# Altium PCB PCB1.PcbDoc
Units mm, origin at the board's own origin, x right, y up, seen from the top; angles counter-clockwise.
Board outline 152.4 x 101.6 mm, 2 copper layers (Top Layer, Bottom Layer); 14 components, 8 nets, 36 pads, 0 vias.
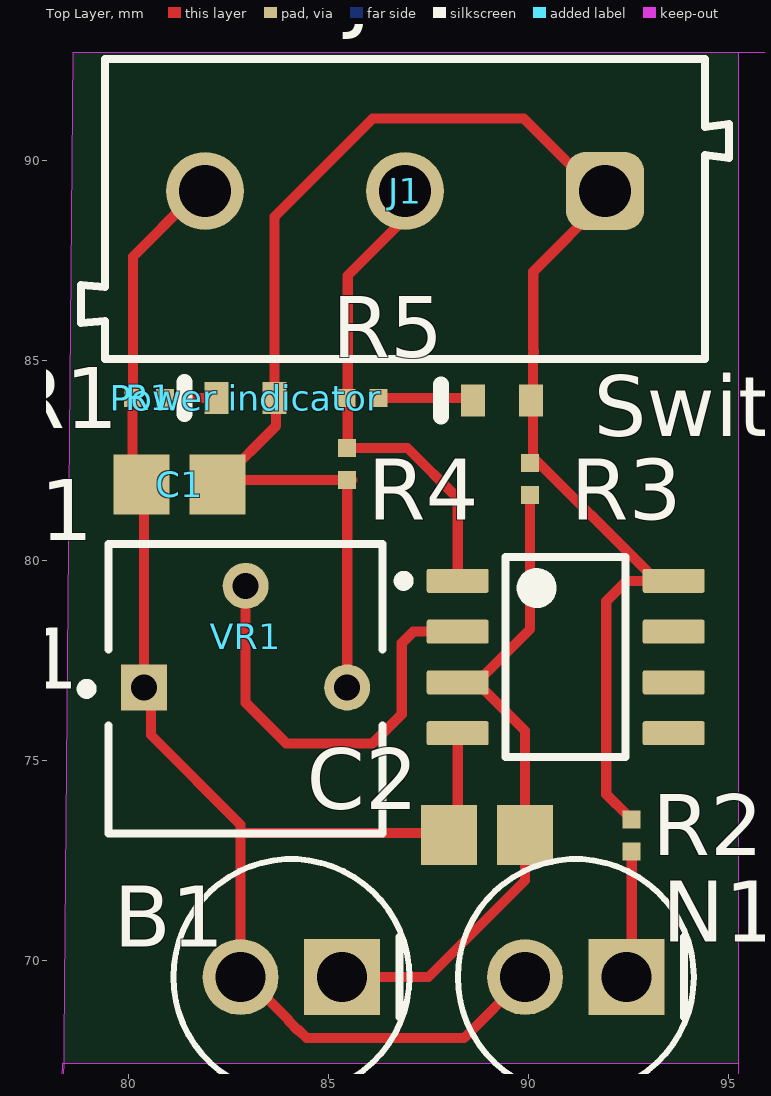
[diagram p0: Top Layer view]
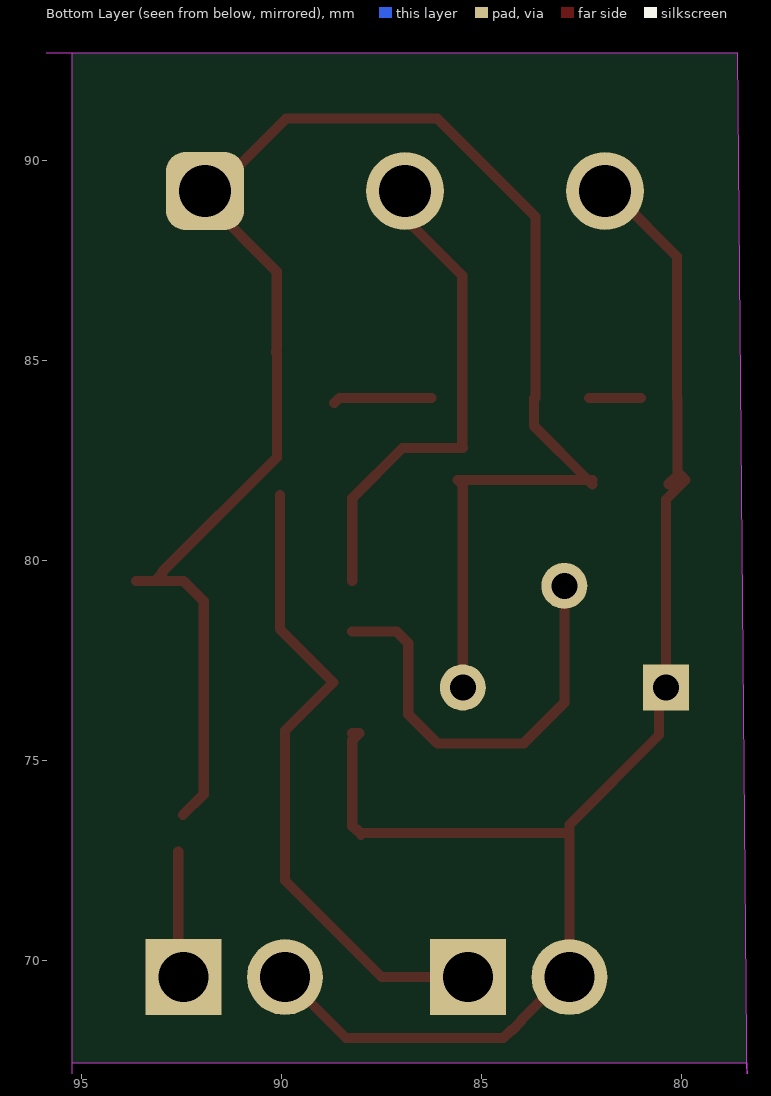
[diagram p1: Bottom Layer view, seen from below]
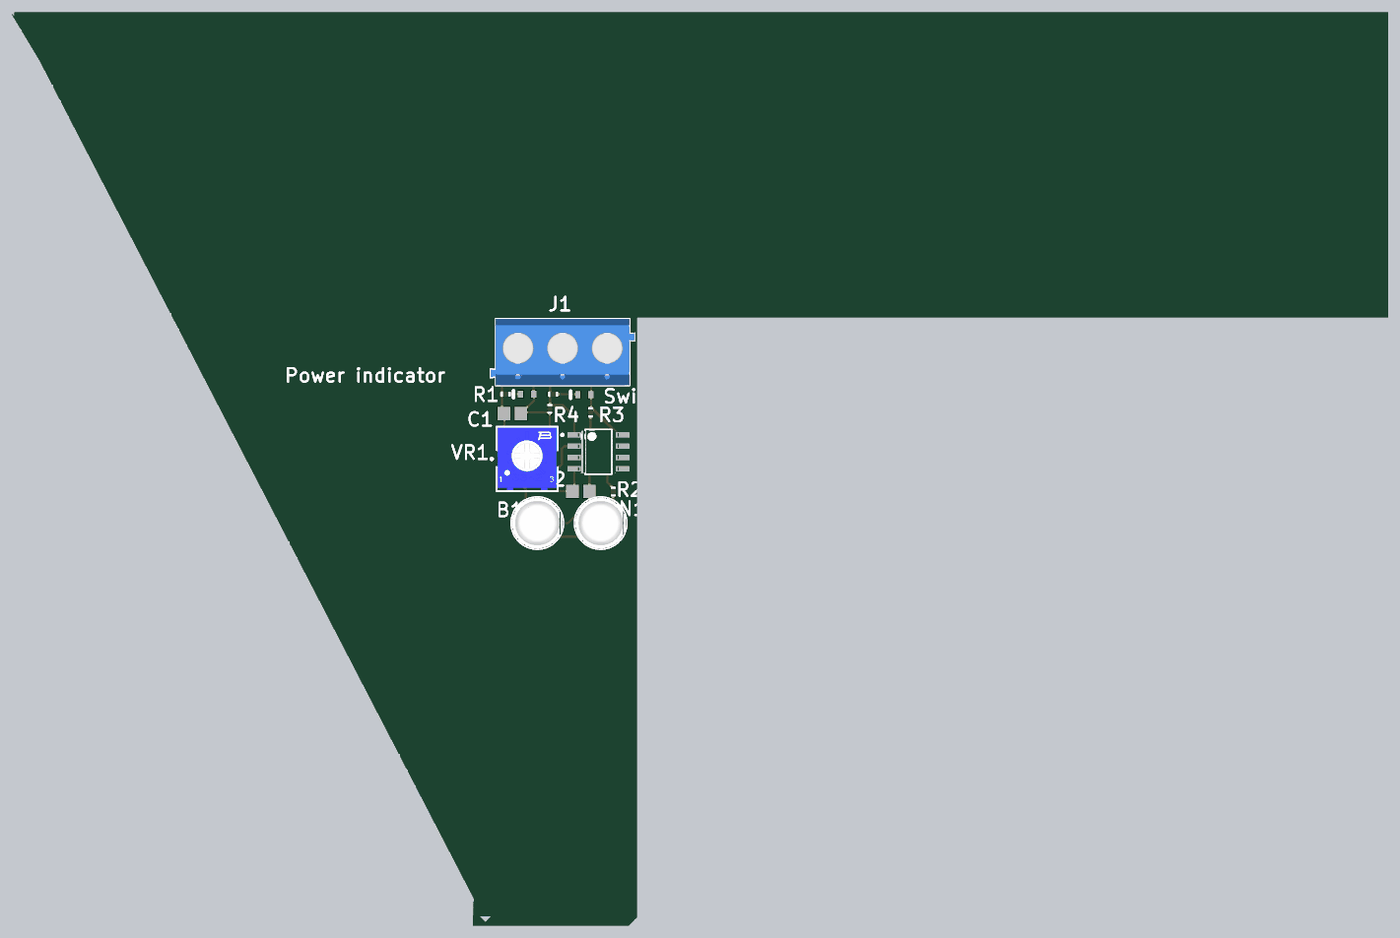
[diagram p2: 3D render of the assembled board from above, using the file's embedded part models]

## Layer stack, top to bottom
Top Solder: solder mask 0.0102, Solder Resist, Dk 3.5
Top Layer: signal copper 0.0356
Dielectric 1: dielectric 0.32, FR-4, Dk 4.8
Bottom Layer: signal copper 0.0356
Bottom Solder: solder mask 0.0102, Solder Resist, Dk 3.5

## Board outline
25.4,25.4 177.8,25.4 177.8,127 25.4,127
cut-out: 25.019,126.873 25.4,126.492 25.4,25.4 77.597,25.4 78.232,24.765 80.137,26.67 80.137,35.052
cut-out: 95.25,92.71 95.25,25.4 179.133,24.066 177.8,92.71
cut-out: 78.359,67.437 95.25,67.437 95.25,25.273 94.361,24.384 76.835,24.384
cut-out: 25.4,127 179.594,127 179.594,92.71 78.613,92.71 77.994,25.4

## Design rules (kind name [scope] priority, off if disabled: settings)
Clearance [All] p1: gap=0.254 ignorepadtopadclearanceinfootprint=FALSE
PolygonConnect [All] p1: connectstyle=Relief reliefconductorwidth=0.254 reliefentries=4 polygonreliefangle="90 Angle" airgapwidth=0.254
RoutingLayers [All] p1: top layer_v5=TRUE bottom layer_v5=FALSE
RoutingVias [All] p1: holewidth=0.711 width=1.27 viastyle="Through Hole" minholewidth=0.711 minwidth=1.27 maxholewidth=0.711 maxwidth=1.27
SolderMaskExpansion [All] p1: expansion=0.102 istentingtop=FALSE
SupplyNets "Schematic Supply Nets_1" [InNet('VCC')] p1: voltage=0.000
SupplyNets "Schematic Supply Nets" [InNet('GND')] p2: voltage=0.000
Width Width_1 [All] p1: maxlimit=0.254 minlimit=0.254 preferedwidth=0.254
Width [All] p2: maxlimit=0.254 minlimit=0.004 preferedwidth=0.254 toplayer_prefwidth=0.006 bottomlayer_minwidth=0.254 minimp=50.000000 maximp=50.000000 favimp=50.000000
29 further rules are at their usual default settings.

## Classes and differential pairs
component class Sheet1: B1 C1 C2 N1 "Power indicator" R1 R2 R3 R4 R5 "Switch indicator" VR1

## Components (designator, comment, footprint, x,y, rotation, side; value= is the part's Value field where it differs from the comment)
B1 "TEPT5600" FP-6_544-5185_03-4-MFG 84.074,69.596 r180 top
C1 "GRM21BR71H104KA01L" CAPC2013X135X45ML10T25 81.28,81.915 r0 top
C2 "GRM21BR71H104KA01L" CAPC2013X135X45ML10T25 88.966,73.152 r0 top
J1 "691102710003" 691102710003 86.915,88.798 r180 top
N1 "TEPT5600" FP-6_544-5185_03-4-MFG 91.186,69.596 r180 top
"Power indicator" "TLMS1000-GS08" VISH-TLMS1000_V 82.931,84.074 r180 top
R1 "ERJ2GE0R00X" RESC1005X40X25LL05T05 80.518,84.074 r0 top
R2 "ERJ2GE0R00X" RESC1005X40X25LL05T05 92.583,73.133 r90 top
R3 "ERJ2GE0R00X" RESC1005X40X25LL05T05 90.043,82.042 r90 top
R4 "ERJ2GE0R00X" RESC1005X40X25LL05T05 85.471,82.423 r270 top
R5 "ERJ2GE0R00X" RESC1005X40X25LL05T05 85.852,84.074 r0 top
"Switch indicator" "TLMS1000-GS08" VISH-TLMS1000_V 89.344,84.01 r180 top
U? "LM393ADR" FP-D0008A-MFG 90.932,77.597 r0 top
VR1 "3362P-1-252LF" FP-3362P-MFG 82.931,76.8 r0 top

## Footprints (in the part's own frame and the unit in brackets; to place one, negate y for a bottom-side part, rotate by r counter-clockwise, add the part's x,y. Pads: shape width x height; smd on the part's side, far side on the other; paste and mask are expansions set on the pad)
691102710003 [mm] "5,00mm - modular - blue - Horizontal entry with pressure clamp - 9,9 mm height - 03p"
  rrect50% 1.95x1.95 hole 1.3: 1(-5,-0.45)
  round 1.95 hole 1.3: 2(0,-0.45) 3(5,-0.45)
  silkscreen extent -8.1,-3.75 8.1,3.75, body extent -8.1,-3.75 8.1,3.75, height 9.96
CAPC2013X135X45ML10T25 [mm] "Chip Capacitor, 2-Leads, Body 2.10x1.35mm, IPC Low Density"
  rect 1.4x1.5 smd: 1(-0.95,0) 2(0.95,0)
  body extent -1.05,-0.67 1.05,0.67, height 1.35
FP-6_544-5185_03-4-MFG [mm]
  rect 1.9x1.9 hole 1.25 paste-2539.97 mask+0: 1(-1.27,0)
  round 1.9 hole 1.25 paste-2539.97 mask+0: 2(1.27,0)
  silkscreen extent -2.95,-2.95 2.95,2.95, body extent -3.05,-3.05 3.05,3.05, height 0.25
FP-3362P-MFG [mm]
  rect 1.15x1.15 hole 0.65 paste-2539.97 mask+0: 1(-2.54,0.035)
  round 1.15 hole 0.65 paste-2539.97 mask+0: 2(0,2.575) 3(2.54,0.035)
  silkscreen extent -4.1,-3.62 3.42,3.62, body extent -3.52,-3.72 3.52,3.72, height 0.25
FP-D0008A-MFG [mm]
  rrect17% 1.55x0.6 smd paste+0 mask+0: 1(-2.7,1.905) 2(-2.7,0.635) 3(-2.7,-0.635) 4(-2.7,-1.905) 5(2.7,-1.905) 6(2.7,-0.635) 7(2.7,0.635) 8(2.7,1.905)
  silkscreen extent -4.17,-2.5 1.5,2.5, body extent -3.57,-2.75 3.57,2.75, height 0.25
RESC1005X40X25LL05T05 [mm] "Chip Resistor, 2-Leads, Body 1.05x0.55mm, IPC High Density"
  rect 0.45x0.45 smd: 1(-0.4,0) 2(0.4,0)
  body extent -0.53,-0.28 0.53,0.28, height 0.4
VISH-TLMS1000_V [mm] "SMD, 2-Leads, Body 0.8x1.6mm"
  rect 0.6x0.8 smd: 1(-0.725,0) 2(0.725,0)
  silkscreen extent 1.53,-0.4 1.53,0.4, body extent -0.8,-0.4 0.8,0.4, height 0.65

## Part data
B1 N1: library part CMP-02533-000004-1, "SENSOR PHOTO 570NM TOP VIEW RAD", Case/Package=Radial, Collector Emitter Breakdown Voltage=6V, Dark Current=50nA, Max Collector Current=20mA, Max Operating Temperature=85°C, Max Power Dissipation=100mW, Min Operating Temperature=-40°C, Operating Supply Voltage=5V, Package Material=SILICON, Package Quantity=4000, Collector Emitter Voltage (VCEO)=6V, Height=8mm, Lead Free="Lead Free", Length=5.75mm, Lens Style=Domed, Mount="Through Hole", Number of Channels=1, Number of Elements=1, Number of Pins=2, Orientation="Top View", Output Type=Analog, Packaging=Bulk, Polarity=NPN, Power Consumption=100mW, Power Dissipation=100mW, Radiation Hardening=No, RoHS Compliant=Yes, Series=-, Viewing Angle=20°, Wavelength=570nm, Width=5.75mm
C1 C2: library part CMP-2100-03644-1, "Chip Capacitor, 0.1 uF, +/- 10%, 50 V, -55 to 125 degC, 0805 (2012 Metric), RoHS, Tape and Reel", Capacitance=82nF, Case Code (Imperial)=0805, Case Code (Metric)=2012, Dielectric=X7R, Dielectric Material=Ceramic, Insulation Resistance=10GR, Manufacturer=Murata, Max Operating Temperature=125degC, Min Operating Temperature=-55degC, Package Description="2-Pin Surface Mount Device, Body 2 x 1.25 mm", Package Quantity=1, Tolerance=10%, Voltage=50V, Case/Package=0805, Datasheet URL=http://psearch.en.murata.com/capacitor/product/GRM21BR71H104KA01%23.pdf, Datasheet Version=42675.0, Depth=1.25mm, Height=1.25mm, Lead Free=LeadFree, Length=2mm, Manufacturer URL=http://www.murata.com/, Material=Ceramic, Mount=SurfaceMount, Number of Pins=2, Package Reference=0805, Packaging=TapeandReel, Radiation Hardening=No, REACH SVHC=Unknown, RoHSCompliant=true, Termination=SMD/SMT, Thickness=0.053inch, Voltage Rating=50V, Voltage Rating (DC)=50V, Width=0.049inch
J1: library part CMP-1502-03259-2, Color=Blue, Current=15A, Max Operating Temperature=105°C, Min Operating Temperature=-40°C, Voltage=300V, Contact Material=Brass, Contact Plating=Tin, Current Rating=15A, Height=13.4mm, Housing Material=Nylon, Lead Pitch=5mm, Length=7.5mm, Mount="Through Hole", NexarPartId=8917707, Number of Contacts=3, Number of Levels=1, Number of Pins=3, Number of Positions Per Level=3, Packaging=Box, Pitch=5.0038mm, Plating=Steel, REACH SVHC=Unknown, RoHS=Compliant, Stripping Length=-6mm, Termination=Screw, Voltage Rating=300V, Width=16.2mm, Wire Gauge (Max)=22AWG, Wire Gauge (Min)=14AWG, Wire/Cable Gauge=22AWG
"Power indicator" "Switch indicator": library part CMP-2000-07254-1, "Low Current LED, 40 mW, 1.8 V, -40 to 100 degC, 2-Pin SMD (0603), RoHS, Tape and Reel", Forward Current If=2mA, Forward Voltage=1.8V, LED Colour=Red, Manufacturer=Vishay, Package Description="2-Pin Surface Mount Device, Body 1.6 x 0.8 mm", Package Reference=TLMS1000, Automotive Qualification Standard=AEC-Q100, Bulb Size=1.6mmx0.8mm, Datasheet URL=https://datasheet.ciiva.com/5798/1698881-5798337.pdf, Datasheet Version="Rev. 1.7, 02/2011", LED Mounting=SMD, Lens Shape=Rectangular, Luminous Intensity=4mcd, Manufacturer URL=http://www.vishay.com/, Mounting Technology=SurfaceMount, MSL=MSL2-1year, Packaging=CutTape, Product Range=-, SVHC=ToBeAdvised, Viewing Angle=80°, Wavelength Typ=636nm
R1 R5: library part CMP-2000-07451-1, "Chip Resistor, 0 Ohm, 0.1 W, -55 to 155 degC, 0402 (1005 Metric), RoHS, Tape and Reel", Case Code (Imperial)=0402, Case Code (Metric)=1005, Manufacturer=Panasonic, Max Operating Temperature=155degC, Max Power Dissipation=100mW, Min Operating Temperature=-55degC, Package Description="2-Pin Surface Mount Device, Body 1 x 0.5 mm", Package Quantity=1, Package Reference=402, Resistance=1KΩ, Temperature Coefficient=600ppm/��C, Tolerance=5%, Voltage Rating=50V, Case/Package=0402, Composition=ThickFilm, Contact Plating=Tin, Datasheet URL=https://industrial.panasonic.com/cdbs/www-data/pdf/RDA0000/AOA0000C301.pdf, Datasheet Version=03/2015, Depth=0.5mm, Height=0.35mm, Lead Free=LeadFree, Length=1mm, Manufacturer URL=http://www.panasonic.com/, Military Standard=Not, Mount=SurfaceMount, Mounting Technology=SurfaceMount, Number of Terminations=2, Packaging=TapeandReel, Power Rating=100mW, Radiation Hardening=No, REACH SVHC=NoSVHC, RoHSCompliant=True, Termination=SMD/SMT, Voltage Rating (DC)=50V, Width=0.02inch
R2: library part CMP-2000-07451-1, "Chip Resistor, 0 Ohm, 0.1 W, -55 to 155 degC, 0402 (1005 Metric), RoHS, Tape and Reel", Case Code (Imperial)=0402, Case Code (Metric)=1005, Manufacturer=Panasonic, Max Operating Temperature=155degC, Max Power Dissipation=100mW, Min Operating Temperature=-55degC, Package Description="2-Pin Surface Mount Device, Body 1 x 0.5 mm", Package Quantity=1, Package Reference=402, Resistance=100Ω, Temperature Coefficient=600ppm/��C, Tolerance=5%, Voltage Rating=50V, Case/Package=0402, Composition=ThickFilm, Contact Plating=Tin, Datasheet URL=https://industrial.panasonic.com/cdbs/www-data/pdf/RDA0000/AOA0000C301.pdf, Datasheet Version=03/2015, Depth=0.5mm, Height=0.35mm, Lead Free=LeadFree, Length=1mm, Manufacturer URL=http://www.panasonic.com/, Military Standard=Not, Mount=SurfaceMount, Mounting Technology=SurfaceMount, Number of Terminations=2, Packaging=TapeandReel, Power Rating=100mW, Radiation Hardening=No, REACH SVHC=NoSVHC, RoHSCompliant=True, Termination=SMD/SMT, Voltage Rating (DC)=50V, Width=0.02inch
R3 R4: library part CMP-2000-07451-1, "Chip Resistor, 0 Ohm, 0.1 W, -55 to 155 degC, 0402 (1005 Metric), RoHS, Tape and Reel", Case Code (Imperial)=0402, Case Code (Metric)=1005, Manufacturer=Panasonic, Max Operating Temperature=155degC, Max Power Dissipation=100mW, Min Operating Temperature=-55degC, Package Description="2-Pin Surface Mount Device, Body 1 x 0.5 mm", Package Quantity=1, Package Reference=402, Resistance=10KΩ, Temperature Coefficient=600ppm/��C, Tolerance=5%, Voltage Rating=50V, Case/Package=0402, Composition=ThickFilm, Contact Plating=Tin, Datasheet URL=https://industrial.panasonic.com/cdbs/www-data/pdf/RDA0000/AOA0000C301.pdf, Datasheet Version=03/2015, Depth=0.5mm, Height=0.35mm, Lead Free=LeadFree, Length=1mm, Manufacturer URL=http://www.panasonic.com/, Military Standard=Not, Mount=SurfaceMount, Mounting Technology=SurfaceMount, Number of Terminations=2, Packaging=TapeandReel, Power Rating=100mW, Radiation Hardening=No, REACH SVHC=NoSVHC, RoHSCompliant=True, Termination=SMD/SMT, Voltage Rating (DC)=50V, Width=0.02inch
U?: library part CMP-04896-000011-1, "IC DUAL DIFF COMPARATOR 8-SOIC", Ambient Temperature Range High=+70°C, Ambient Temperature Range Low=0°C, Input Bias Current=-0.025uA, Input Offset Voltage=1mV, Manufacturer="Texas Instruments", Max Junction Temp=+150°C, Max Supply Voltage=30V, Min Supply Voltage=2V, Nominal Supply Current=0.6mA, Package=D0008A, Temperature="0°C to +70°C", Voltage Gain=200V/mV, Automotive=No, Category=IC, ComponentLink2Description=Datasheet, ComponentLink2URL=http://www.ti.com/lit/ds/symlink/lm393a.pdf, Device Class L1="Integrated Circuits (ICs)", Device Class L2="Linear ICs", Device Class L3=Comparators, Digikey Description="IC DUAL DIFF COMPARATOR 8-SOIC", Height=1.75mm, Lead Free=Yes, Manufacturer Part Number=LM393ADR, Mouser Description="Analog Comparators Dual Diff A Grade", Number of Channels=2, Octopart=https://octopart.com/lm393adr-texas+instruments-428362, Response Time=1.3us, RoHS=TRUE, Standoff Height=0.11mm, Temperature Range High=+70°C, Temperature Range Low=0°C
VR1: library part CMP-00059-10485830-1, "3362P-1-252LF 1/4\" Sq, Thru-Hole, TRIMMER, 2.5 Kilohms, Cermet, Single Turn", Max Operating Temperature=125°C, Max Power Dissipation=500mW, Min Operating Temperature=-55°C, Resistance=10KΩ, Temperature Coefficient=100ppm/°C, Tolerance=10%, Composition=Cermet, Depth=6.99mm, Height=4.699mm, Length=6.6mm, Military Standard=Not, Mount="Through Hole", NexarPartId=10485830, Number of Turns=1, Power Rating=500mW, Radiation Hardening=No, REACH SVHC="No SVHC", RoHS=Compliant, Schedule B="8533400080, 8533400080", Termination=Pin, Width=6.604mm

## Nets (pads, with @x,y where several pads share a name; then routed paths per layer and width w, separated by ;. In a path a pad name is that pad's centre, name@x,y a point inside that pad or via, vN(x,y) a via of type N, cw(c..) or ccw(c..) an arc to the next point about the centre after c; other vN are vias at no path point)
Do: J1.2 R4.1 R5.1 U?.1 | length 12.1
  Top Layer w0.254: R4.1 86.976,82.823 88.232,81.567 U?.1 ; R4.1@85.484,82.836 85.484,84.201 85.484,87.135 86.441,88.092 86.441,88.094 86.915,88.568 J1.2@86.915,89.027
GND: B1.2 C1.1 C2.1 J1.3 N1.2 R1.1 U?.4 VR1.1 | length 38.3
  Top Layer w0.254: C1.1@80.01,82.131 79.902,82.023 80.391,81.534 VR1.1 80.563,76.663 80.563,75.647 82.804,73.406 82.804,73.194 ; R1.1@80.099,84.074 80.099,82.146 C1.1 ; R1.1 80.118,87.611 81.534,89.027 J1.3@81.915,89.027 ; C2.1 87.974,73.194 82.804,73.194 ; C2.1@88.105,73.279 88.124,73.26 88.232,73.368 88.232,75.519 88.145,75.606 88.059,75.692 U?.4 ; N1.2 88.392,68.072 84.455,68.072 84.262,68.265 84.236,68.265 84.013,68.488 84.013,68.514 82.804,69.723 82.804,73.194
NetB1_1: B1.1 C2.2 R3.1 U?.3 | length 16.3
  Top Layer w0.254: B1.1 87.503,69.596 89.916,72.009 C2.2 89.916,75.753 88.707,76.962 90.043,78.298 R3.1
NetN1_1: N1.1 R2.1 | length 3.4
  Top Layer w0.254: N1.1@92.329,69.723 N1.1 92.583,69.723 R2.1
"NetPower indicator_2": "Power indicator.2" R1.2 | length 1.3
  Top Layer w0.254: R1.2@81.016,84.074 82.31,84.074
NetR5_2: "Switch indicator.2" R5.2 | length 2.5
  Top Layer w0.254: R5.2 88.556,84.074 88.683,83.947
NetU?_2: U?.2 VR1.2 | length 10.8
  Top Layer w0.254: VR1.2 82.931,76.454 83.947,75.438 86.106,75.438 86.835,76.167 86.835,77.945 87.122,78.232 U?.2
VCC: "Power indicator.1" "Switch indicator.1" C1.2 J1.1 R2.2 R3.2 R4.2 U?.8 VR1.3 | length 45.4
  Top Layer w0.254: C1.2 C1.2@82.338,82.023 ; C1.2@82.23,82.023 C1.2@82.338,82.023 ; 83.656,84.074 83.656,88.609 86.106,91.059 89.883,91.059 91.915,89.027 90.121,87.233 90.121,85.328 90.133,85.217 ; 83.693,84.074 83.693,83.378 C1.2@82.338,82.023 ; VR1.3@85.362,76.702 VR1.3@85.362,77.16 ; VR1.3 85.471,81.896 85.598,82.023 C1.2@82.338,82.023 ; 90.117,85.201 90.117,84.201 90.117,82.593 92.984,79.726 92.984,79.675 U?.8@93.157,79.502 ; R2.2@92.466,73.65 91.948,74.168 91.948,78.994 92.456,79.502 U?.8@93.157,79.502 ; U?.8 93.208,79.502 U?.8@93.157,79.502
pads on no net: U?.5 U?.6 U?.7